# EAGLE board PCB v63 (EAGLE 9.7.0)
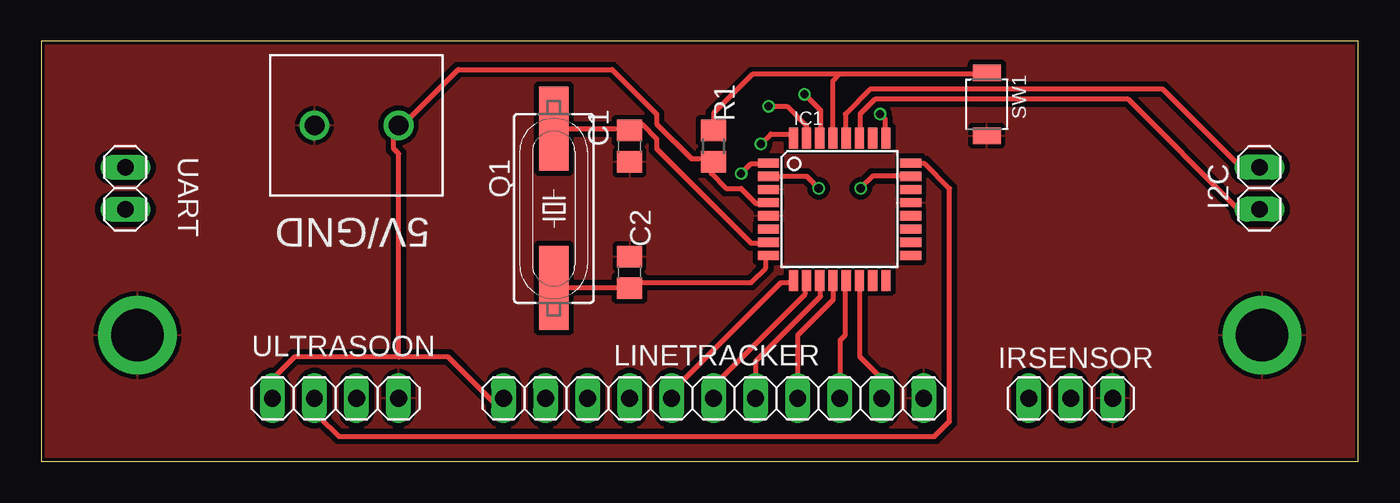
[diagram p0: board, top side]
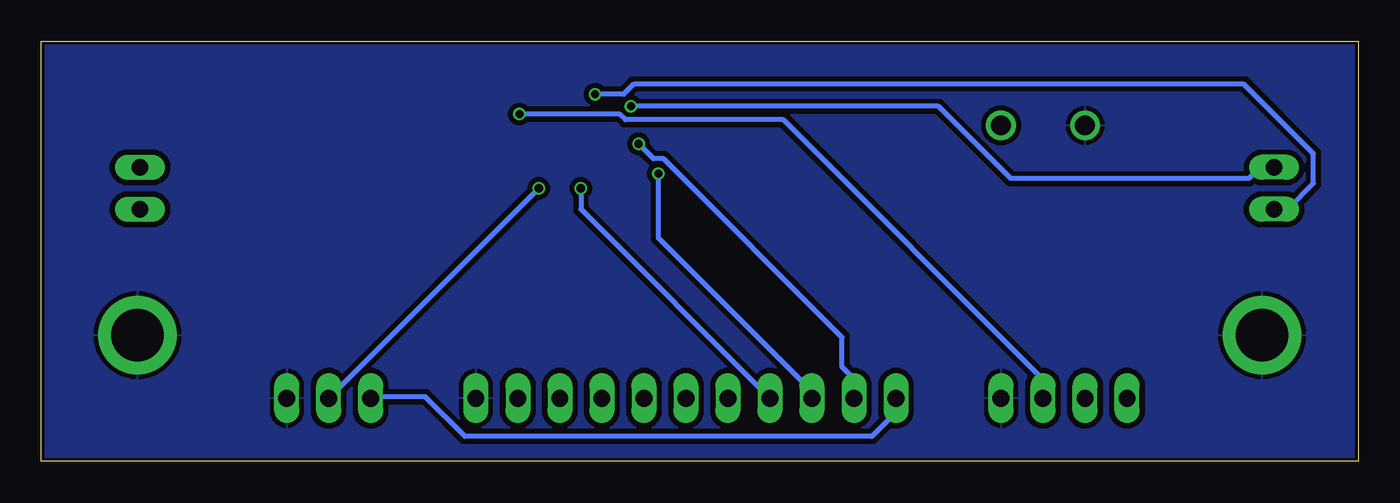
[diagram p1: board, bottom side, seen from below]

Size 79.6 x 25.4 mm. Coordinates in mm from the lower left corner, seen from the top.
Outline: 0,25.4 0,0 79.6,0 79.6,25.4 0,25.4
Copper layers (1*16): Top 0.035mm / dielectric 1.5mm / Bottom 0.035mm
Design rules "LPKF-S63_Design-Rules": minimum track width 0.3mm, minimum drill 0.35mm, track to track 0.3mm, track to pad 0.3mm, pad to pad 0.2mm, via to via 0.3mm, smd to smd 0.25mm, copper to edge 0.2mm, drill to drill 0.3mm, minimum pad ring 0.1mm, minimum via ring 0.1mm, stop-mask expansion 4mil, vias tented up to drill 0mil, thermal gap 10mil

## Footprints (pad centres in the part's own frame; a part is rotated, then mirrored left to right if it is on the bottom)
TERMBLK_508-2N = drill 1.2: 1 0,0; 2 5.08,0
C0805 = smd 1.3 x 1.5: 1 -0.95,0; 2 0.95,0
1X02 = drill 1.016 long: 1 -1.27,0; 2 1.27,0
TQFP32-08 = smd 1.27 x 0.559: 1 -4.293,2.8; 2 -4.293,2; 3 -4.293,1.2; 4 -4.293,0.4; 5 -4.293,-0.4; 6 -4.293,-1.2; 7 -4.293,-2; 8 -4.293,-2.8; 17 4.293,-2.8; 18 4.293,-2; 19 4.293,-1.2; 20 4.293,-0.4; 21 4.293,0.4; 22 4.293,1.2; 23 4.293,2; 24 4.293,2.8 | smd 0.559 x 1.27: 9 -2.8,-4.293; 10 -2,-4.293; 11 -1.2,-4.293; 12 -0.4,-4.293; 13 0.4,-4.293; 14 1.2,-4.293; 15 2,-4.293; 16 2.8,-4.293; 25 2.8,4.293; 26 2,4.293; 27 1.2,4.293; 28 0.4,4.293; 29 -0.4,4.293; 30 -1.2,4.293; 31 -2,4.293; 32 -2.8,4.293
1X03 = drill 1.016 long: 1 -2.54,0; 2 0,0; 3 2.54,0
1X11 = drill 1.016 long: 1 -12.7,0; 2 -10.16,0; 3 -7.62,0; 4 -5.08,0; 5 -2.54,0; 6 0,0; 7 2.54,0; 8 5.08,0; 9 7.62,0; 10 10.16,0; 11 12.7,0
BEAGLEBONEBLACK_MOUNTING_HOLE = drill 3.175 pad 4.445: P$1 0,0
SM49 = smd 5.08 x 1.778: 1 -4.826,0; 2 4.826,0
R0805 = smd 1.3 x 1.5: 1 -0.95,0; 2 0.95,0
SW2-2.6-3.0X2.5X1.2+0.4MM = smd 1 x 1.7: 1 -1.9,0; 2 1.9,0
1X04 = drill 1.016 long: 1 -3.81,0; 2 -1.27,0; 3 1.27,0; 4 3.81,0

## Placement (x,y rotation side)
5V/GND  2828XX-2282837-2  [TERMBLK_508-2N]  16.51,20.32 0 top
C1  22pF  [C0805]  35.56,19.05 90 top
C2  22pF  [C0805]  35.56,11.43 90 top
I2C  PINHD-1X2  [1X02]  73.64,16.51 90 top
IC1  ATMEGA328P  [TQFP32-08]  48.26,15.24 0 top
IRSENSOR  PINHD-1X3  [1X03]  62.23,3.81 0 top
LINETRACKER  PINHD-1X11  [1X11]  40.64,3.81 180 top
MGT1  BEAGLEBONEBLACK_MOUNTING_HOLE  [BEAGLEBONEBLACK_MOUNTING_HOLE]  5.8,7.62 0 top
MGT2  BEAGLEBONEBLACK_MOUNTING_HOLE  [BEAGLEBONEBLACK_MOUNTING_HOLE]  73.8,7.62 0 top
Q1  16MHz  [SM49]  30.98,15.29 90 top
R1  4.7k  [R0805]  40.64,19.05 90 top
SW1  B3U-1000P-2P-SMD  [SW2-2.6-3.0X2.5X1.2+0.4MM]  57.15,21.59 270 top
UART  PINHD-1X2  [1X02]  5.08,16.51 270 top
ULTRASOON  PINHD-1X4  [1X04]  17.78,3.81 0 top

## Library data of the parts
5V/GND = Connector; CATEGORY: Connector; DESCRIPTION: 2 Position Wire to Board Terminal Block Horizontal with Board 5.08 mm Through Hole; MANUFACTURER: TE Connectivity; MPN: 282837-2; OPERATING_TEMPERATURE: -40°C to +105°C; PART_STATUS: ACTIVE; ROHS_COMPLIANCE: RoHS Compliant; SERIES: 282837; SUBCATEGORY: Terminal Block; TYPE: Side Wire Entry
C1 C2 = rcl; SPICEPREFIX: C
I2C IRSENSOR LINETRACKER UART ULTRASOON = Connector; CATEGORY: CONNECTOR; SUB-CATEGORY: PIN-HEADER
IC1 = IC_Embedded; CATEGORY: IC_Embedded; MANUFACTURER: Microchip; MPN: ATmega328P-MMH; OPERATING_TEMP: -40 to 85 °C; PART_STATUS: Active; SUB-CATEGORY: Microcontroller
MGT1 MGT2 = BeagleBone_Black_Wireless
Q1 = crystal; OC_FARNELL: unknown; OC_NEWARK: unknown
R1 = rcl; SPICEPREFIX: R
SW1 = One_Dimensional_Pong; MPN: B3U-1000P-2P-SMD

## Nets
AREF: IC1.20
AVCC: IC1.18
GND: 5V/GND.1 C1.1 C2.2 IC1.3 IC1.5 IC1.21 IRSENSOR.3 LINETRACKER.1 MGT1.P$1 MGT2.P$1 SW1.2 ULTRASOON.4
N$1: C2.1 IC1.8 Q1.1
N$2: C1.2 IC1.7 Q1.2
N$3: IC1.29 R1.2 SW1.1
N$4: IC1.32 LINETRACKER.10
N$5: IC1.2 LINETRACKER.8
N$6: IC1.9 LINETRACKER.7
N$7: IC1.10 LINETRACKER.6
N$8: IC1.11 LINETRACKER.5
N$9: IC1.24 ULTRASOON.2
N$10: IC1.12 LINETRACKER.4
N$11: IC1.13 LINETRACKER.3
N$12: IC1.25 ULTRASOON.3
N$14: IC1.23 IRSENSOR.2
N$15: IC1.1 LINETRACKER.9
N$16: IC1.30 UART.2
N$17: IC1.31 UART.1
N$18: I2C.1 IC1.27
N$19: I2C.2 IC1.28
N$20: IC1.14 LINETRACKER.2
V+: 5V/GND.2 IC1.4 IRSENSOR.1 LINETRACKER.11 R1.1 ULTRASOON.1
VCC1: IC1.6

## Tracks (layer width: path | path; a pad name or v marks a point on that pad's centre or on a via)
GND
  pour Top: 0,25.4 79.6,25.4 79.6,0 0,0
  pour Bottom: 0,25.4 79.6,25.4 79.6,0 0,0
N$1
  Top 0.3: IC1.8 43.8,12.3 43.8,11.7 42.9,10.8 36,10.8 35.7,10.5 C2.1 35.4,10.5 31.2,10.5 Q1.1
N$2
  Top 0.3: IC1.7 43.8,13.2 42.9,13.2 37.2,18.9 37.2,19.5 36.3,20.4 36,20.4 35.7,20.1 C1.2 35.4,20.1 31.2,20.1 Q1.2
N$3
  Top 0.3: R1.2 40.64,21.05 42.99,23.4 48.26,23.4 | 48.26,23.4 57,23.4 SW1.1 | IC1.29 47.86,23 48.26,23.4
N$4  (via drill 0.5)
  Top 0.3: v43.5,19.2 44.1,19.8 45.3,19.8 IC1.32
  Bottom 0.3: v43.5,19.2 42.6,18.3 42,18.3 31.2,7.5 31.2,5.7 30.6,5.1 30.6,3.9 LINETRACKER.10
N$5  (via drill 0.5)
  Top 0.3: IC1.2 46.26,17.24 v46.99,16.51
  Bottom 0.3: v46.99,16.51 46.99,15.24 LINETRACKER.8
N$6
  Top 0.3: LINETRACKER.7 38.1,4.2 44.7,10.8 45.3,10.8 IC1.9
N$7
  Top 0.3: LINETRACKER.6 40.8,3.9 40.8,4.74 46.19,10.13 46.19,10.88 IC1.10
N$8
  Top 0.3: IC1.11 47.1,10.8 47.1,9.97 43.2,6.07 43.2,3.9 LINETRACKER.5
N$9
  Top 0.3: IC1.24 52.8,18 53.4,18 54.9,16.5 54.9,2.4 54,1.5 18,1.5 16.8,2.7 16.8,3.6 ULTRASOON.2
N$10
  Top 0.3: IC1.12 47.86,9.76 45.72,7.62 LINETRACKER.4
N$11
  Top 0.3: IC1.13 48.6,10.8 48.6,7.64 48.3,7.34 48.3,3.9 LINETRACKER.3
N$12  (via drill 0.5)
  Top 0.3: v50.7,21 51,20.7 51,19.8 IC1.25
  Bottom 0.3: ULTRASOON.3 19.2,3.9 19.2,5.1 34.75,20.65 44.3,20.65 44.65,21 v50.7,21
N$14  (via drill 0.5)
  Top 0.3: IC1.23 50.26,17.24 v49.53,16.51
  Bottom 0.3: v49.53,16.51 IRSENSOR.2
N$15  (via drill 0.5)
  Top 0.3: v42.3,17.4 42.9,18 43.8,18 IC1.1
  Bottom 0.3: v42.3,17.4 42.3,13.5 33.3,4.5 33.3,3.9 LINETRACKER.9
N$16  (via drill 0.5)
  Top 0.3: v46.13,22.2 47.1,21.23 47.1,19.8 IC1.30
  Bottom 0.3: UART.2 4.8,15.3 4.2,15.3 2.7,16.8 2.7,18.6 6.9,22.8 43.8,22.8 44.4,22.2 v46.13,22.2
N$17  (via drill 0.5)
  Top 0.3: IC1.31 46.26,20.28 45.07,21.48 v43.96,21.48
  Bottom 0.3: UART.1 5.1,17.7 6,17.7 6.6,17.1 21,17.1 25.38,21.48 v43.96,21.48
N$18
  Top 0.3: IC1.27 49.5,19.8 49.5,21 50.4,21.9 65.7,21.9 72.3,15.3 73.5,15.3 I2C.1
N$19
  Top 0.3: IC1.28 48.6,19.8 48.6,21 50.1,22.5 67.8,22.5 72.3,18 73.5,18 I2C.2
N$20
  Top 0.3: IC1.14 49.5,10.8 49.5,6.3 50.7,5.1 50.7,3.9 LINETRACKER.2
V+
  Top 0.3: IC1.4 43.8,15.6 43.2,15.6 42.3,16.5 41.4,16.5 40.5,17.4 40.5,18 R1.1 40.5,18.3 39.3,18.3 37.2,20.4 37.2,21 34.5,23.7 25.2,23.7 21.6,20.1 5V/GND.2 21.3,20.1 21.3,18.9 21.6,18.6 21.6,6.3 | 21.6,6.3 24.6,6.3 27.3,3.6 27.9,3.6 LINETRACKER.11 | 21.6,6.3 15.3,6.3 14.1,5.1 14.1,3.9 ULTRASOON.1
  Bottom 0.3: IRSENSOR.1 59.4,3.9 56.4,3.9 54,1.5 29.4,1.5 28.2,2.7 28.2,3.6 LINETRACKER.11